# Altium PCB current_sense.PcbDoc
Units mil, origin at the board's own origin, x right, y up, seen from the top; angles counter-clockwise.
Board outline 1875 x 800 mil, 2 copper layers (Top Layer, Bottom Layer); 20 components, 13 nets, 61 pads, 5 vias.
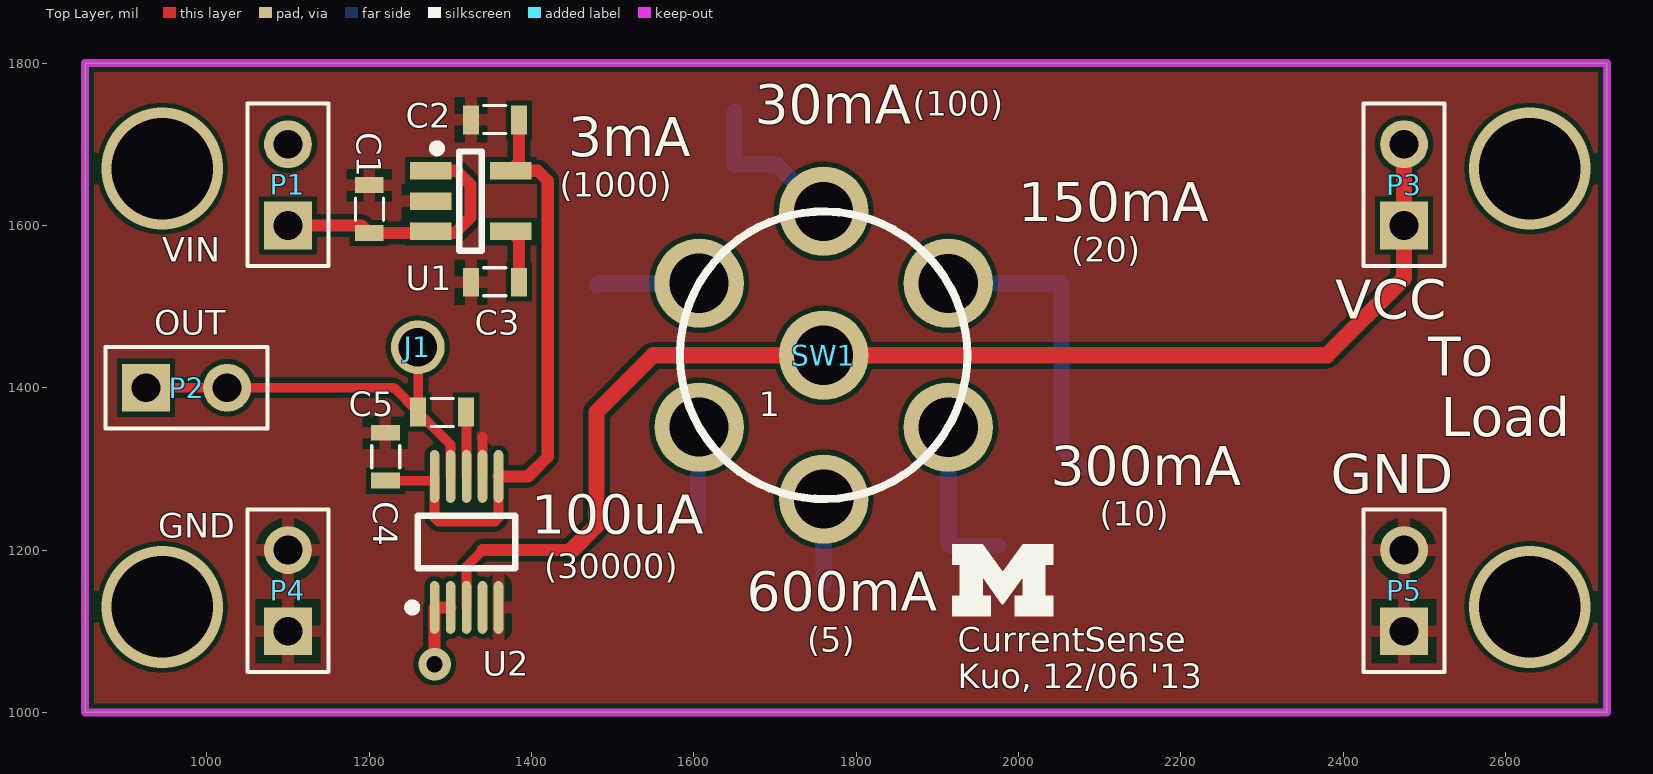
[diagram p0: Top Layer view]
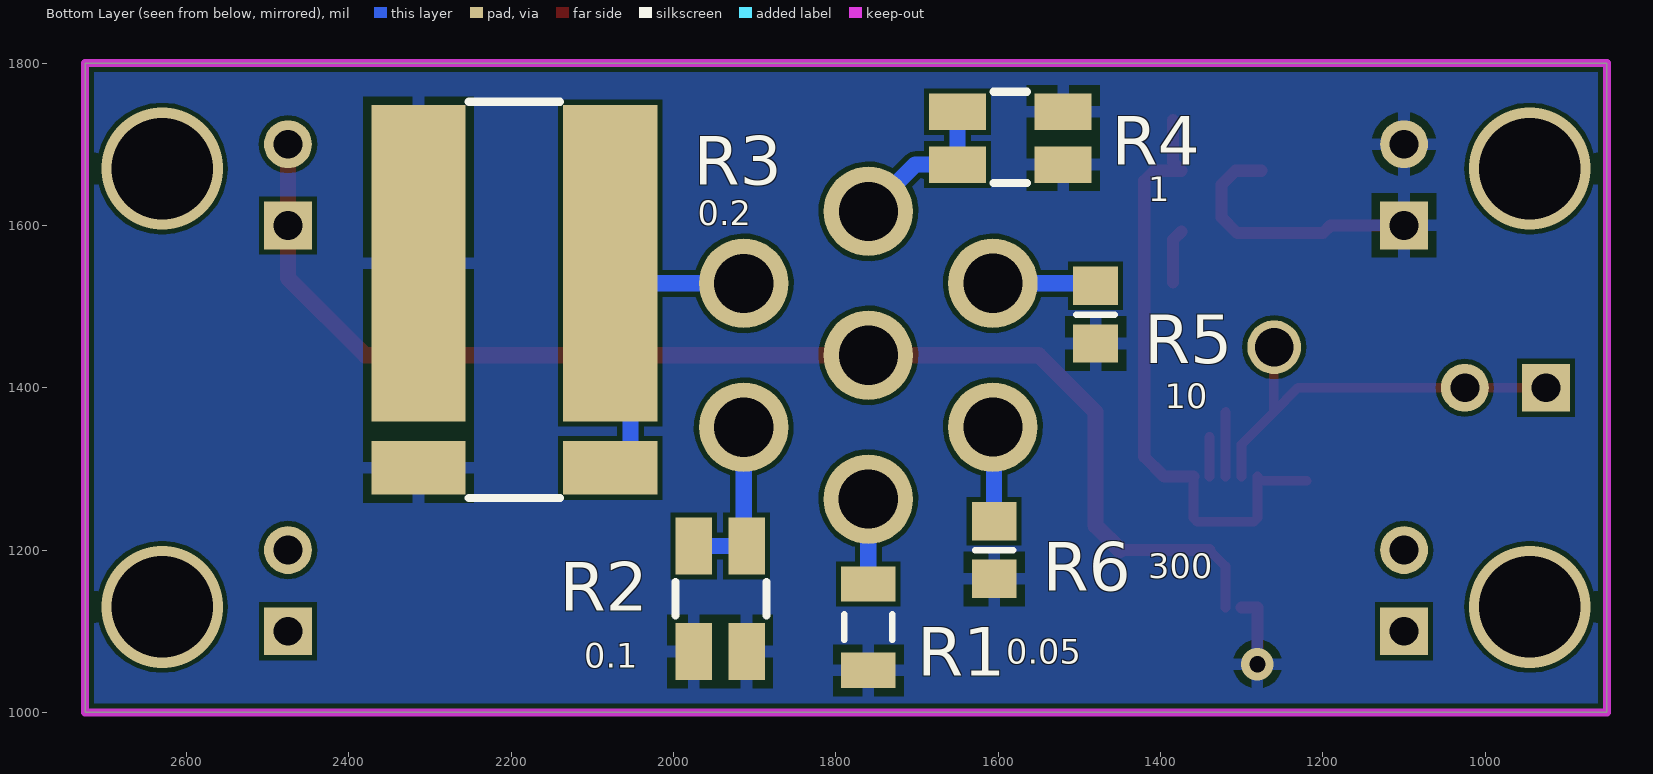
[diagram p1: Bottom Layer view, seen from below]

## Layer stack, top to bottom
Top Solder: solder mask 0.4, Solder Resist, Dk 3.5
Top Layer: signal copper 1.4
Dielectric 1: dielectric 12.6, FR-4, Dk 4.8
Bottom Layer: signal copper 1.4
Bottom Solder: solder mask 0.4, Solder Resist, Dk 3.5

## Board outline
850,1000 850,1800 2725,1800 2725,1000

## Design rules (kind name [scope] priority, off if disabled: settings)
Clearance "Clearance~Sunstone Circuits" [All] p1: gap=6 // Sunstone Circuits Minimum Clearance Rule (Double Sided)
HoleSize "HoleSize~Sunstone Circuits" [All] p1: absolutevalues=TRUE maxlimit=251 minlimit=16 maxpercent=80.000 minpercent=20.000 // SSC Hole Size Rule For Single Sided & Double Sided Designs.
HoleSize Testpoint [All] p2: absolutevalues=TRUE maxlimit=100 minlimit=1 maxpercent=80.000 minpercent=20.000
HoleSize TestPointUsage [All] p3: absolutevalues=TRUE maxlimit=100 minlimit=1 maxpercent=80.000 minpercent=20.000
MinimumAnnularRing "MinimumAnnularRing~Sunstone Circuits" [All] p1: minimumring=7 // Sunstone Circuits Minimum Annular Ring (Double Sided)
PlaneClearance "PlaneClearance~Sunstone Circuits" [All] p1: clearance=12 // Sunstone Circuits Power Plane Clearance Rule (Double Sided)
PlaneConnect "PlaneConnect~Sunstone Circuits" [All] p1: planeconnectstyle=Relief reliefexpansion=10 reliefentries=4 reliefconductorwidth=8 reliefairgap=10 // Sunstone Circuits Power Plane Connect Rule (Double Sided)
PolygonConnect "PolygonConnect~Sunstone Circuits" [All] p1: connectstyle=Relief reliefconductorwidth=15 reliefentries=4 polygonreliefangle="90 Angle" airgapwidth=10 // Sunstone Circuits Polygon Connect Style (Double Sided)
RoutingVias "RoutingVias~Sunstone Circuits" [All] p1: holewidth=16 width=30 viastyle="Through Hole" minholewidth=16 minwidth=30 maxholewidth=20 maxwidth=40 // Sunstone Circuits Routing Vias Rule (Double Sided)
ShortCircuit "ShortCircuit~Sunstone Circuits" [All] p1: allowed=FALSE // Sunstone Circuits Short Circuit Rule~Do Not Allow (Double Sided)
SolderMaskExpansion "SolderMaskExpansion~Sunstone Circuits" [All] p1: expansion=3 // Sunstone Circuits Solder Mask Expansion Rule (Double Sided)
UnpouredPolygon [All] p1: allowunpoured=FALSE
ViasUnderSMD "ViasUnderSMD~Sunstone Circuits" [All] p1: allowed=FALSE // Sunstone Circuits Vias Under SMD~Do Not Allow (Double Sided)
Width "Width~Sunstone Circuits" [All] p1: maxlimit=100 minlimit=6 preferedwidth=10 // Sunstone Circuits Minimum Width Rule (Double Sided)
25 further rules are at their usual default settings.

## Classes and differential pairs
component class "Room Definition 1": J1

## Components (designator, comment, footprint, x,y, rotation, side; value= is the part's Value field where it differs from the comment)
C1 "Ceramic capacitor" 0603 1200,1620 r90 top
C2 "Ceramic capacitor" 0603 1355,1730 r180 top
C3 "Ceramic capacitor" 0603 1355,1530 r180 top
C4 "Ceramic capacitor" 0603 1220,1315 r90 top
C5 "Ceramic capacitor" 0603 1290,1370 r0 top
J1 "5004" TestPoint 1260,1450 r0 top
P1 "1 x 2 header" "1x2 header" 1100,1650 r90 top
P2 "1 x 2 header" "1x2 header" 975,1400 r0 top
P3 "1 x 2 header" "1x2 header" 2475,1650 r90 top
P4 "1 x 2 header" "1x2 header" 1100,1150 r90 top
P5 "1 x 2 header" "1x2 header" 2475,1150 r90 top
R1 "Res3" C1206 1760,1105 r90 bottom
R2 "Res3" VCS1610 1910,1075 r90 bottom
R3 "Res3" CSM3637 2205,1520 r270 bottom
R4 "Res3" VCS1610 1520,1740 r0 bottom
R5 "Res3" 6-0805_N 1480,1490 r90 bottom
R6 "Res3" 6-0805_N 1605,1200 r90 bottom
SW1 "MRY106-A" "MRY switch" 1760,1440 r300 top
U1 "LP3985" SOT23-5 1325,1630 r0 top
U2 "MAX9923" 10umax 1320,1210 r90 top

## Footprints (in the part's own frame and the unit in brackets; to place one, negate y for a bottom-side part, rotate by r counter-clockwise, add the part's x,y. Pads: shape width x height; smd on the part's side, far side on the other; paste and mask are expansions set on the pad)
"1x2 header" [mm] "1x2 header, 100 mils"
  rect 1.5x1.5 hole 0.9: 1(-1.27,0)
  round 1.5 hole 0.9: 2(1.27,0)
  silkscreen extent -2.54,-1.27 2.54,1.27, body extent -2.53,-1.26 2.53,1.26, height 8.38
6-0805_N [mm] "Chip Resistor, Body 2.0x1.2mm, IPC Medium Density"
  rect 1.2x1.4 smd: 1(-0.9,0) 2(0.9,0)
  silkscreen extent 0,-0.6 0,0.6, body extent -1.07,-0.7 1.07,0.7, height 0.7
10umax [mm] "TSSOP, 10-Leads, Body 3.00x3.00mm, Pitch 0.50mm, IPC Medium Density"
  oval 1.65x0.3 smd: 1(-2.05,1) 2(-2.05,0.5) 3(-2.05,0) 4(-2.05,-0.5) 5(-2.05,-1) 6(2.05,-1) 7(2.05,-0.5) 8(2.05,0) 9(2.05,0.5) 10(2.05,1)
  silkscreen extent -2.17,-1.52 0.82,1.82, body extent -1.55,-1.55 1.55,1.55, height 1.1
0603 [mm] "2-Leads, Body 1.55x0.85mm, IPC Medium Density"
  rect 0.5x0.9 smd: 1(-0.75,0) 2(0.75,0)
  silkscreen extent -0.35,-0.45 0.35,0.43, body extent -0.75,-0.42 0.75,0.43, height 0.5
C1206 [mm] "Chip Capacitor, Body 3.2x1.6mm, IPC High Density"
  rect 1.1x1.7 smd: 1(-1.35,0) 2(1.35,0)
  silkscreen extent -0.4,-0.75 0.4,0.75, body extent -1.7,-0.9 1.7,0.9, height 1.3
CSM3637 [mm]
  rect 9.91x2.95 smd: 1(-0.85,-2.775) 2(-0.85,3.225)
  rect 1.68x2.95 smd: 1(5.555,-2.775) 2(5.555,3.225)
  silkscreen extent -5.9,-1.2 6.5,1.65
"MRY switch" [mm]
  round 2.8 hole 1.85: 1(0,-4.5) 2(-3.9,-2.25) 3(-3.9,2.25) 4(0,4.5) 5(3.9,2.25) 6(3.9,-2.25) A(0,0)
  silkscreen extent -4.5,-4.5 4.5,4.5
SOT23-5 [mm] "SOT23, 5-Leads, Body 2.9x1.6mm, Pitch 0.95mm, Lead Span 2.8mm, IPC High Density"
  rect 1.3x0.55 smd: 1(-1.25,0.95) 2(-1.25,0) 3(-1.25,-0.95) 4(1.25,-0.95) 5(1.25,0.95)
  silkscreen extent -1.17,-1.55 0.35,1.77, body extent -0.67,-1.5 0.65,1.5, height 1.45
TestPoint [mm]
  round 1.68 hole 1.2: 1(0,0)
  body extent -1.26,-1.27 1.27,1.27, height 4.57
VCS1610 [mil]
  rect 70x45 smd: 1(0,0) 1(0,65) 2(130,0) 2(130,65)
  silkscreen extent 44,-25 86,88

## Part data
C1 C2: library part C_1u_0603_ceramic, "Ceramic capacitor, 1 uF, 0603 package"
C3: library part C_10000p_0603_ceramic, "Ceramic capacitor, 10000 pF, 0603 package"
C4: library part C_0.1u_0603_ceramic, "Ceramic capacitor, 0.1 uF, 0603 package"
C5: library part C_1000p_0603_ceramic, "Ceramic capacitor, 1000 pF, 0603 package"
J1: library part TestPoint, "TEST POINT PC MINI .040\"D YELLOW"
P1 P2 P3 P4 P5: "100 mils standard header"
R1 R2 R3 R4 R5 R6: "Resistor"
SW1: "SW ROTARY SP BLK KNOB 125V"
U1: "150mA Low-Noise Ultra Low-Dropout CMOS Voltage Regulator"
U2: "ultra-precision, high-side current-sense amplifier"

## Via types
v1: diameter 150, hole 125, Top Layer to Bottom Layer, 4 vias
v2: diameter 40, hole 20, Top Layer to Bottom Layer, 1 vias

## Nets (pads, with @x,y where several pads share a name; then routed paths per layer and width w, separated by ;. In a path a pad name is that pad's centre, name@x,y a point inside that pad or via, vN(x,y) a via of type N, cw(c..) or ccw(c..) an arc to the next point about the centre after c; other vN are vias at no path point)
GND: C1.2 C2.2 C3.2 C4.2 P4.1 P4.2 P5.1 P5.2 U1.2 U2.5 U2.7 | length 49
  Top Layer w12: U2.7 1339.68,1339.68
NetC3_1: C3.1 U1.4 | length 66.9
  Top Layer w15: U1.4 1384.53,1582.28 C3.1
NetC5_2: C5.2 U2.8 | length 79.5
  Top Layer w12: C5.2 1320,1369.53 U2.8
NetP3_1: P3.1 P3.2 SW1.A U2.3 | length 1599.8
  Top Layer w12: U2.3 1320,1180 1340,1200
  Top Layer w15: 1340,1200 1450,1200
  Top Layer w20: 1450,1200 1480,1230 1480,1370 1550,1440 SW1.A 2380,1440 2475,1535 P3.1 P3.2
NetR1_2: R1.2 SW1.6 | length 104.6
  Bottom Layer w20: R1.2 1760.06,1158.21 SW1.6
NetR2_2: R2.2 SW1.5 | length 205.8
  Bottom Layer w20: SW1.5 1913.49,1208.49 1916.97,1205 R2.2@1975,1205
NetR3_2: R3.2 SW1.4 | length 377.3
  Bottom Layer w20: SW1.4 2053.15,1528.58 2053.15,1326.18 R3.2@2078.03,1301.3
NetR4_2: R4.2 SW1.3 | length 198.9
  Bottom Layer w20: R4.2@1650,1740 1650,1675 1702.21,1675 SW1.3
NetR5_2: R5.2 SW1.2 | length 127.9
  Bottom Layer w20: R5.2 1483.25,1528.68 SW1.2
NetR6_2: R6.2 SW1.1 | length 116.6
  Bottom Layer w20: R6.2 1605,1349.85 SW1.1
VCC3.3: C2.1 C4.1 U1.5 U2.6 U2.10 | length 768.9
  Top Layer w12: C4.1 U2.10@1275.39,1285.47 ; U2.10 1280.63,1239.37 1285,1235 1355,1235 1359.37,1239.37 U2.6
  Top Layer w15: U2.6 1395.71,1290.71 1420,1315 1420,1655 1407.6,1667.4 U1.5 1384.53,1677.72 C2.1
VIN: C1.1 P1.1 P1.2 R1.1 R2.1 R3.1 R4.1 R5.1 R6.1 U1.1 U1.3 U2.1 U2.2 | length 423.1
  Top Layer w15: P1.1 1190.47,1600 C1.1 1305.47,1590.47 1325,1610 1325,1650 1307.6,1667.4 U1.1 ; v2(1280.63,1059.37) U2.1 U2.2
VOUT: C5.1 J1.1 P2.1 P2.2 U2.9 | length 523.9
  Top Layer w12: P2.1 P2.2 1230.47,1400 C5.1 ; J1.1 1260.47,1449.53 C5.1 ; U2.9 1300.31,1330.16 C5.1
pads on no net: U2.4
copper on no net:
  other v1: 945,1130 2630,1130 945,1670 2630,1670

## Polygon pours and split planes (outlines as drawn)
VIN on Bottom Layer "Bottom Layer-No Net" (solid, pour order 4): 850,1800 2725,1800 2725,1000 850,1000
GND on Top Layer "Bottom Layer-No Net" (solid, pour order 2): 850,1000 2725,1000 2725,1800 850,1800

## Keep-outs
Keep-Out Layer:
  the board outline again, w10

## Silkscreen, mask and mechanical layers (free items; w line width, h text height)
Top Overlay:
  region: 1918.25,1118.25 1965.64,1118.25 1965.64,1143.55 1956,1143.55 1956,1166.45 1979.5,1133.51 1981.1,1133.51 2005,1166.45 2005,1143.55 1995.36,1143.55 1995.36,1118.25 2042.75,1118.25 2042.75,1143.55 2033.11,1143.55 2033.11,1181.71 2042.75,1181.71 2042.75,1207.01 2005.2,1207.01 1981.1,1173.68 1979.9,1173.68 1955.8,1207.01 1918.25,1207.01 1918.25,1181.71 1927.49,1181.71 1927.49,1143.55 1918.25,1143.55
  text "(100)" at 1870,1735 h30
  text "30mA" at 1675,1725 h48
  text "3mA" at 1445,1685 h48
  text "(1000)" at 1435,1635 h30
  text "150mA" at 2000,1605 h48
  text "VIN" at 945,1555 h30
  text "(20)" at 2065,1555 h30
  text "VCC" at 2390,1485 h48
  text "OUT" at 935,1465 h30
  text "To" at 2505,1415 h48
  text "1" at 1680,1365 h30
  text "Load" at 2520,1340 h48
  text "300mA" at 2040,1280 h48
  text "GND" at 2385,1270 h48
  text "(10)" at 2100,1230 h30
  text "100uA" at 1400,1220 h48
  text "GND" at 940,1215 h30
  text "(30000)" at 1415.49,1165 h30
  text "600mA" at 1665,1125 h48
  text "(5)" at 1740,1075 h30
  text "CurrentSense" at 1925,1075 h30
  text "Kuo, 12/06 '13" at 1925,1030 h30
Bottom Overlay:
  text "1" at 1415,1630 h30
  text "0.2" at 1970,1600 h30
  text "10" at 1395,1375 h30
  text "300" at 1415,1165 h30
  text "0.05" at 1590,1060 h30
  text "0.1" at 2110,1055 h30